# Altium PCB Asfaloth_L2_AVI_ver0.0.PcbDoc (part 1 of 2)
Units mil, origin at the board's own origin, x right, y up, seen from the top; angles counter-clockwise.
Board outline 4135 x 3937.01 mil, 2 copper layers (Top Layer, Bottom Layer); 80 components, 219 nets, 489 pads, 1059 vias.
Unrouted connection lines stored in the file: 5.
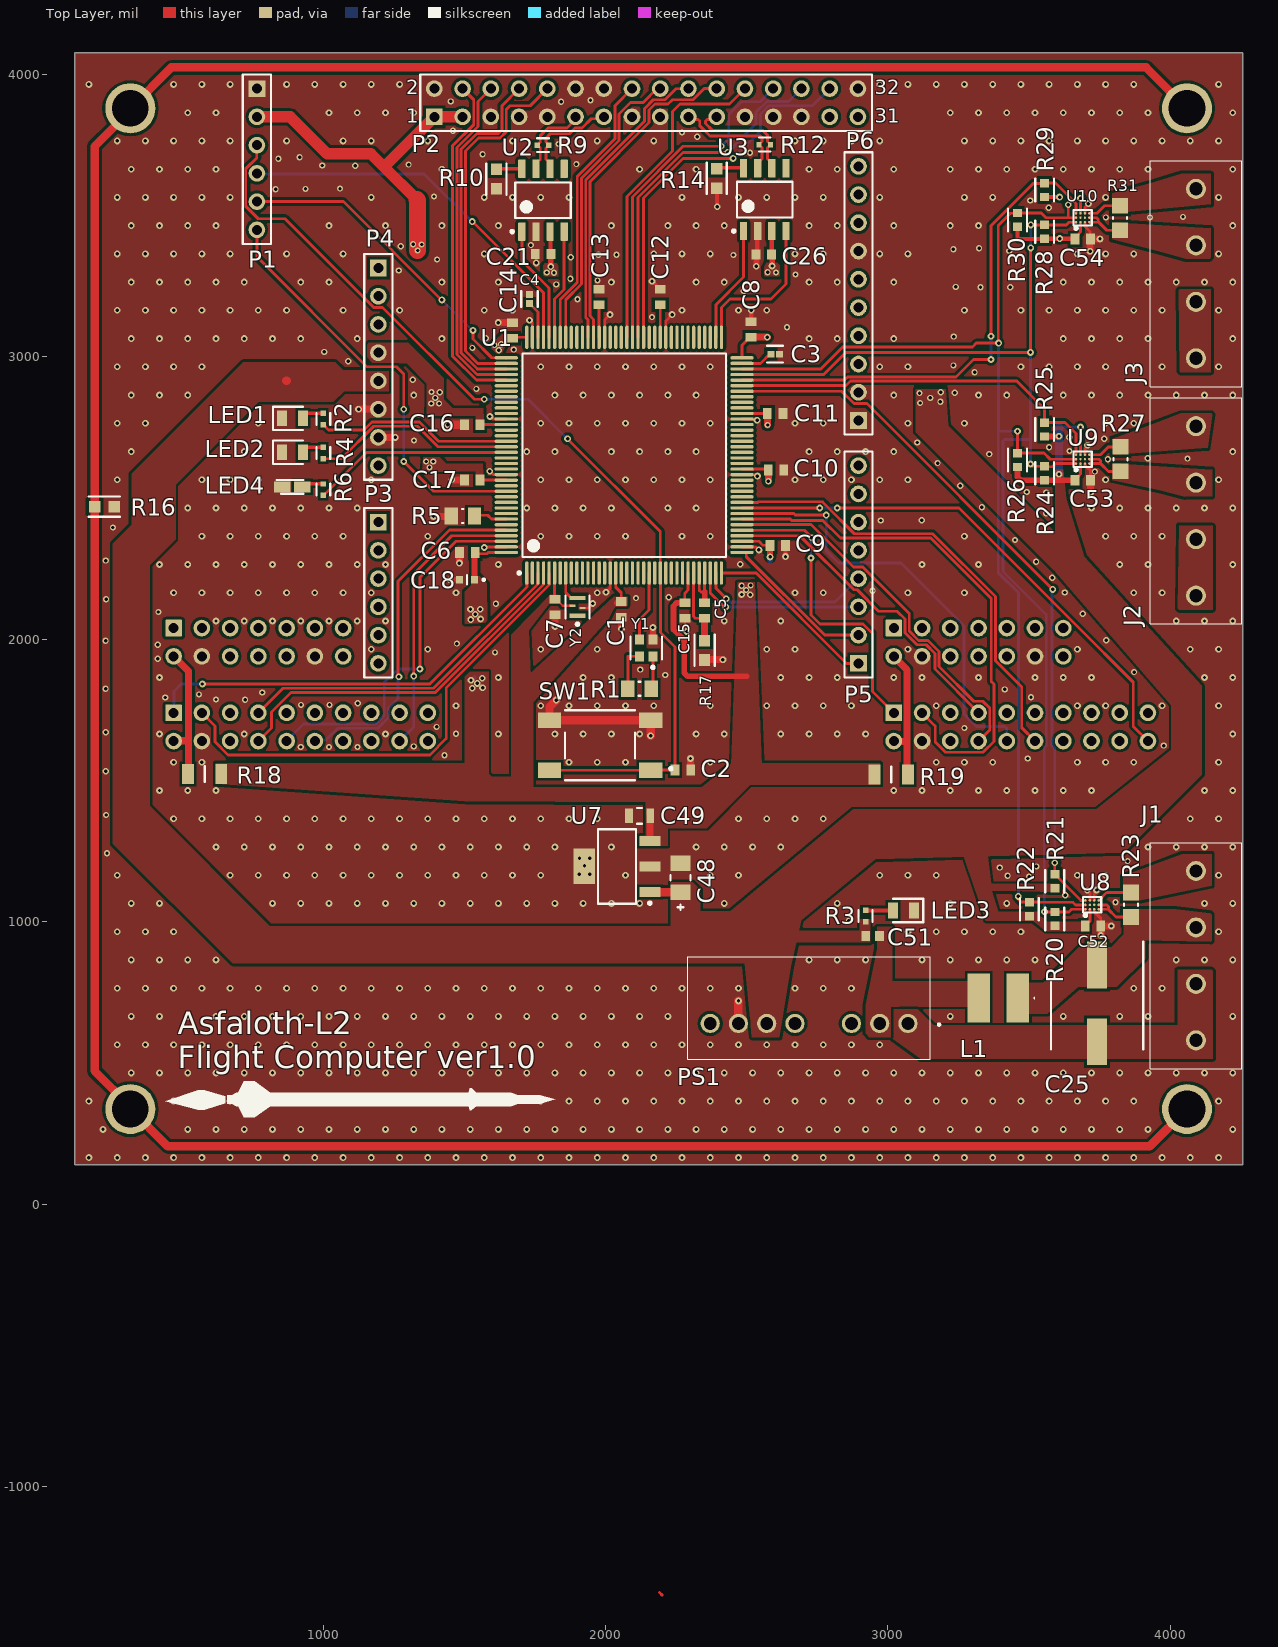
[diagram p0: Top Layer view]
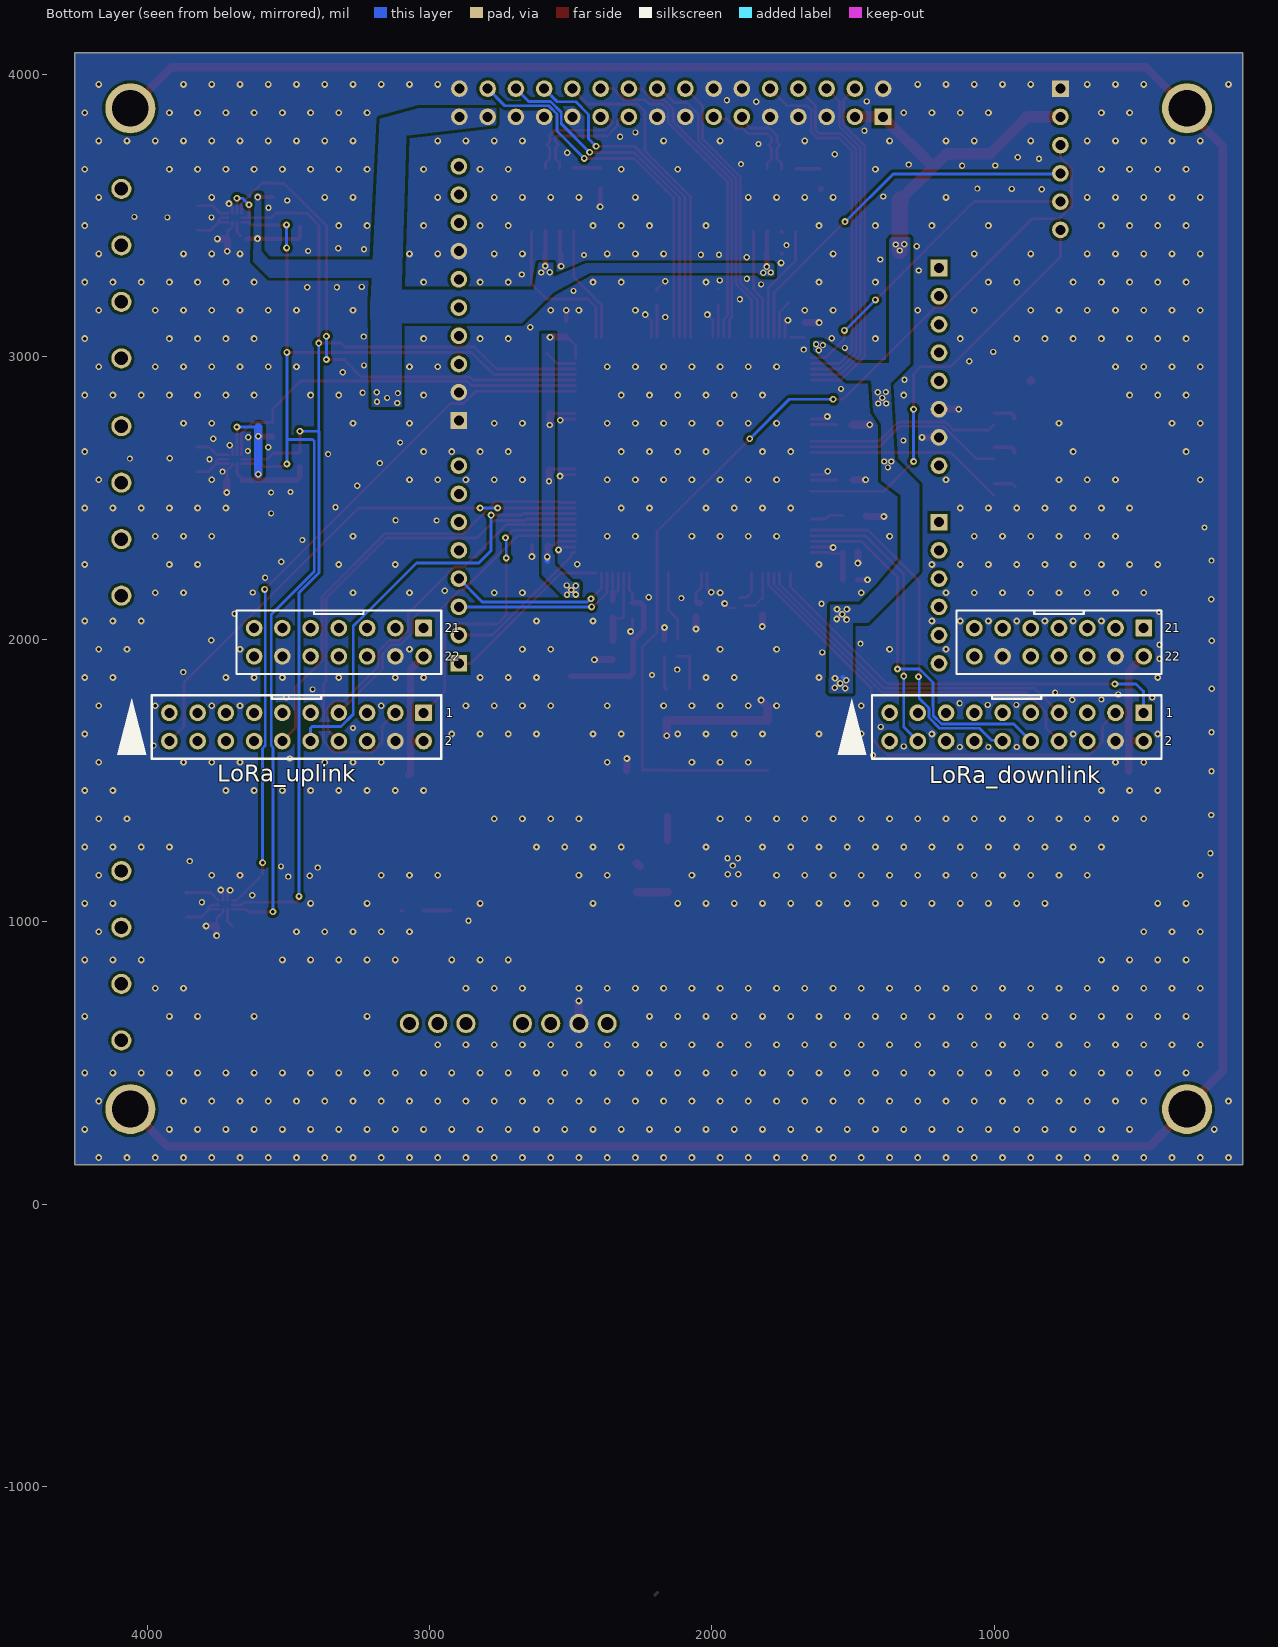
[diagram p1: Bottom Layer view, seen from below]
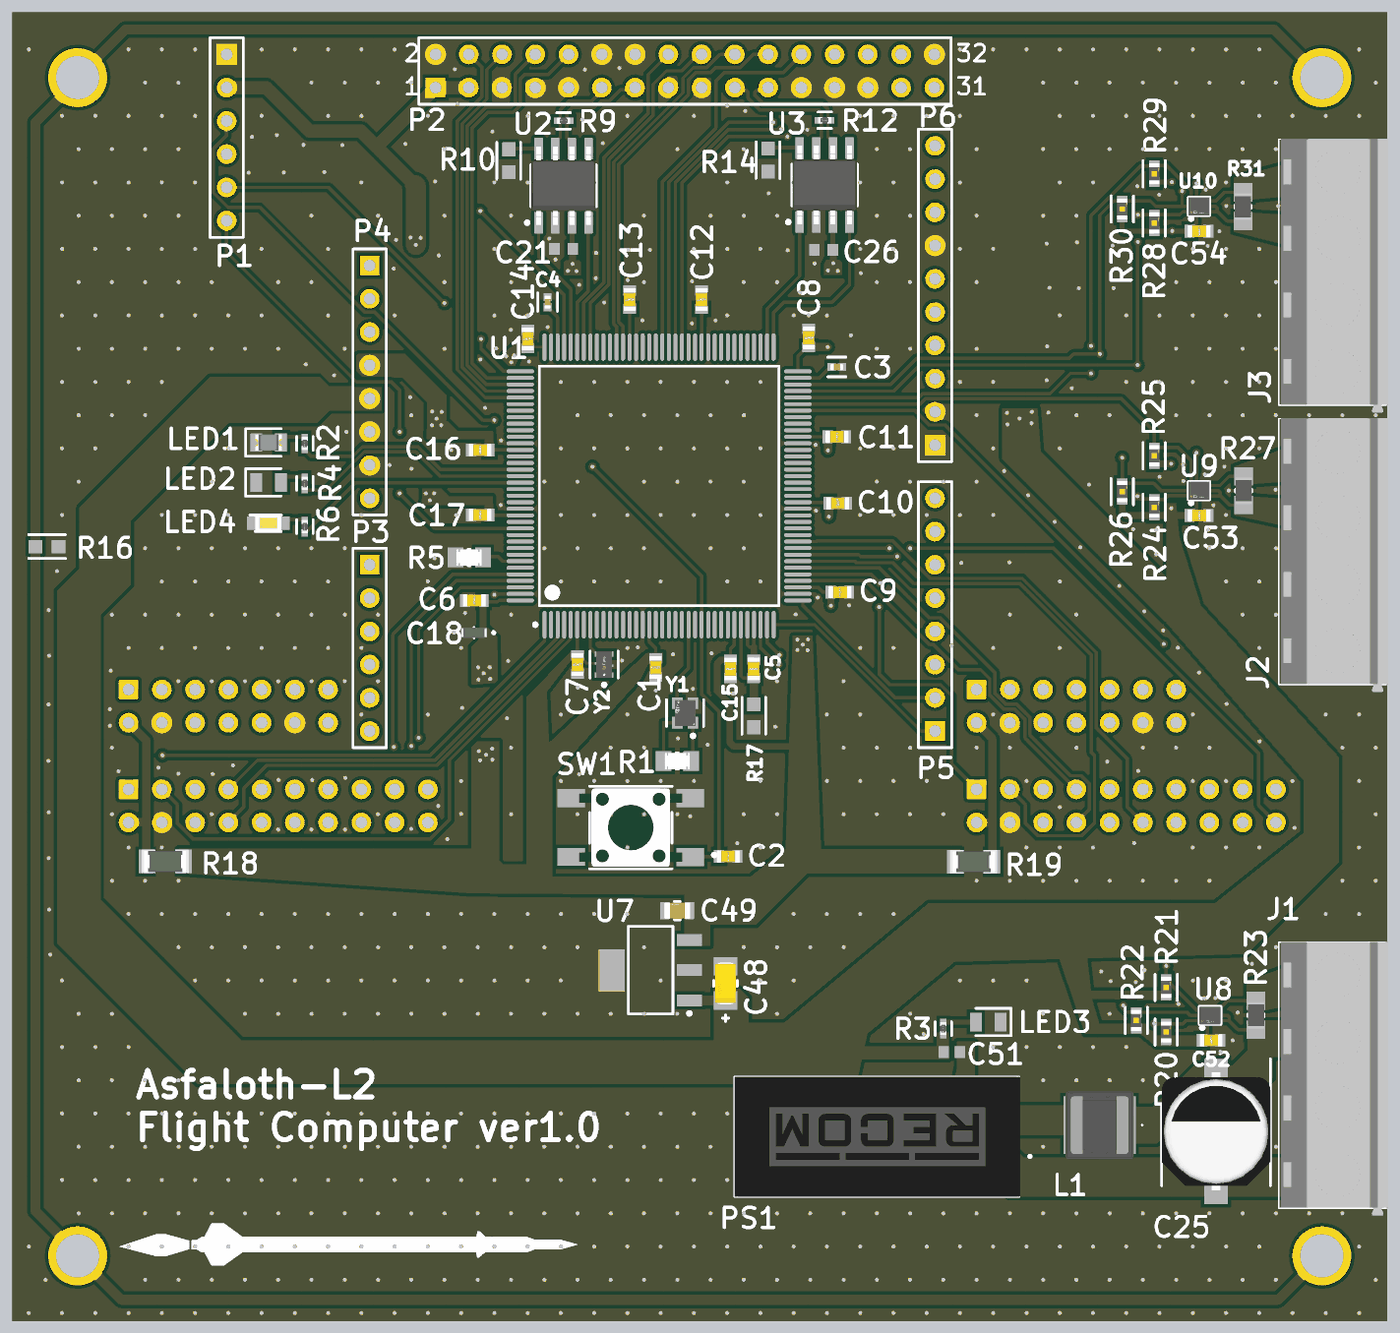
[diagram p3: 3D render of the assembled board from above, using the file's embedded part models]

## Layer stack, top to bottom
Top Solder: solder mask 0.4, Solder Resist, Dk 3.5
Top Layer: signal copper 1.4
Dielectric 1: dielectric 12.6, FR-4, Dk 4.8
Bottom Layer: signal copper 1.4
Bottom Solder: solder mask 0.4, Solder Resist, Dk 3.5

## Board outline
121,140 121,4077.01 4256,4077.01 4256,140

## Design rules (kind name [scope] priority, off if disabled: settings)
Clearance [All] p1: gap=5 ignorepadtopadclearanceinfootprint=FALSE except(10: Arc-Fill Arc-Poly Arc-Region Track-Fill Track-Poly Track-Region SMDPad-Fill SMDPad-Poly SMDPad-Region THPad-Fill THPad-Poly THPad-Region Via-Fill Via-Poly Via-Region Fill-Fill Fill-Poly Fill-Region Poly-Poly Poly-Region Region-Region)
DiffPairsRouting [All] p1: maxlimit=10 minlimit=10 mostfreqgap=10 toplayer_minwidth=10 toplayer_maxwidth=15 toplayer_prefwidth=15 bottomlayer_minwidth=10 bottomlayer_maxwidth=15 bottomlayer_prefwidth=15 maxuncoupledlength=500
PlaneClearance [All] p1: clearance=8
PlaneConnect [All] p1: planeconnectstyle=Direct reliefexpansion=20 reliefentries=4 reliefconductorwidth=10 reliefairgap=10
PolygonConnect PolygonConnect_1 [All vs InNetClass('PWR')] p1: connectstyle=Direct reliefconductorwidth=10 reliefentries=4 polygonreliefangle="90 Angle" airgapwidth=10
PolygonConnect [All] p2: thpad.connectstyle=Relief thpad.reliefconductorwidth=10 thpad.reliefentries=4 thpad.polygonreliefangle="90 Angle" thpad.airgapwidth=10 smdpad.connectstyle=Direct smdpad.reliefconductorwidth=10 smdpad.reliefentries=4 smdpad.polygonreliefangle="90 Angle" smdpad.airgapwidth=10 via.connectstyle=Direct via.reliefconductorwidth=10 via.reliefentries=4 via.polygonreliefangle="90 Angle" via.airgapwidth=10
RoutingVias [All] p1: holewidth=12 width=24 viastyle="Through Hole" minholewidth=12 minwidth=24 maxholewidth=12 maxwidth=24
SolderMaskExpansion Via [All] p1: expansion=4 istentingtop=TRUE useseparateexpansions=TRUE expansionbottom=4 istentingbottom=TRUE
Width PWR [InNetClass('PWR')] p1: maxlimit=60 minlimit=8 preferedwidth=15 minimp=50.000000 maximp=50.000000 favimp=50.000000
Width [All] p2: maxlimit=16 minlimit=6 preferedwidth=10
27 further rules are at their usual default settings.

## Classes and differential pairs
net class PWR: 3V3_VCC 5V_VCC 7V4_VCC 14V8_VCC 25V9_VCC AGND AVDD Chassis_GND FC_GND FC_VCC GND IN-_PM2 IN-_PM3 Motor_GND PA_GND VDD_ANA VDD_FEM VDD_RFS VIN_DCDC
component class U_LoRa_downlink: LoRa_downlink
channel class SX1276_e268v01a: U_LoRa_downlink U_LoRa_uplink
differential pair CAN_Motor: +CAN_Motor_P -CAN_Motor_N
differential pair CAN_EGSE: +CAN_EGSE_P -CAN_EGSE_N

## Components (designator, comment, footprint, x,y, rotation, side; value= is the part's Value field where it differs from the comment)
C1 "0.1uF" CAPC1608X87N 2056,2106.44 r270 top
C2 "0.1uF" CAPC1608X87N 2274,1538 r0 top
C3 "2.2uF" FP-GRT155-0_2-IPC_C 2600.69,3010 r0 top
C4 "2.2uF" FP-GRT155-0_2-IPC_C 1731,3205 r90 top
C5 "0.1uF" CAPC1608X87N 2351,2102.44 r270 top
C6 "0.1uF" CAPC1608X87N 1511,2307.83 r180 top
C7 "0.1uF" CAPC1608X87N 1821,2115 r270 top
C8 "0.1uF" CAPC1608X87N 2516,3097.56 r90 top
C9 "0.1uF" CAPC1608X87N 2610,2333 r0 top
C10 "0.1uF" CAPC1608X87N 2603.56,2600 r0 top
C11 "0.1uF" CAPC1608X87N 2601,2800 r0 top
C12 "0.1uF" CAPC1608X87N 2194.11,3212.56 r90 top
C13 "0.1uF" CAPC1608X87N 1977.57,3212.56 r90 top
C14 "0.1uF" CAPC1608X87N 1671,3094 r90 top
C15 "0.1uF" CAPC1608X87N 2281,2102 r270 top
C16 "0.1uF" CAPC1608X87N 1528.44,2760 r180 top
C17 "0.1uF" CAPC1608X87N 1528.44,2565 r180 top
C18 "4.7uF" GRT188 1509.99,2210.99 r180 top
C21 "Cap Semi" 1608[0603] 1779,3365 r180 top value=100nF
C25 "10uF" CAPAE830X650N 3741,711.06 r270 top locked
C26 "Cap Semi" 1608[0603] 2561,3362 r180 top value=100nF
C48 "4.7uF" FP-TAJA-MFG 2266,1156.18 r270 top
C49 "1uF" FP-GCM21B-0_15-MFG 2121,1375 r180 top
C51 "220pF" CAPC1608X87X35LL15T15 2946.39,950 r180 top
C52 "0.1uF" CAPC1608X87N 3726,985.32 r0 top
C53 "0.1uF" CAPC1608X87N 3689.87,2563.32 r0 top
C54 "0.1uF" CAPC1608X87N 3689.87,3418.32 r0 top
J1 "282837-4" 2828374 4091,580 r90 top locked
J2 "282837-4" 2828374 4091,2155 r90 top locked
J3 "282837-4" 2828374 4091,2995 r90 top locked
L1 "47uH" SRR5228A 3391,730 r270 top
LED1 "LED_R" LEDC2012X80N 891.98,2782.65 r0 top
LED2 "LED_G" LEDC2012X90N 891.98,2662.65 r0 top
LED3 "LED_G" LEDC2012X90N 3056,1040 r180 top
LED4 "LED_B" LEDM2012X100N 891,2540 r0 top
LoRa_downlink "SM12xx Header" "HDR34 Header" 471,1740 r0 bottom locked (schematic designator K_SX12xx)
LoRa_uplink "SM12xx Header" "HDR34 Header" 3021,1740 r0 bottom locked (schematic designator K_SX12xx)
P1 "Header 6" HDR1X6 766,3950 r270 top
P2 "Header 16X2" HDR2X16 1394,3850 r0 top locked
P3 "Header 6" HDR1X6 1196,2415 r270 top locked
P4 "Header 8" HDR1X8 1196,3315 r270 top locked
P5 "Header 8" HDR1X8 2896,1915 r90 top locked
P6 "Header 10" HDR1X10 2896,2775 r90 top locked
PS1 "RS6-0505S" RS60505S 3071,640 r180 top locked
R1 "10kOhm" FP-CRCW0805-e3-IPC_A 2121,1825 r180 top
R2 "120Ohm" FP-ERJ2RK-MFG 1001,2780 r90 top
R3 "120Ohm" FP-ERJ2RK-MFG 2921,1020.18 r90 top
R4 "120Ohm" FP-ERJ2RK-MFG 1001,2660 r90 top
R5 "10kOhm" FP-CRCW0805-e3-IPC_A 1495,2437 r180 top
R6 "120Ohm" FP-ERJ2RK-MFG 1001,2530 r90 top
R9 "120Ohm" FP-ERJ2RK-MFG 1779,3750 r0 top
R10 "0Ohm" FP-AC0603-0_55-IPC_A 1614,3630 r90 top
R12 "120Ohm" FP-ERJ2RK-MFG 2564,3752 r0 top
R14 "0Ohm" FP-AC0603-0_55-IPC_A 2394,3632 r90 top
R16 "0Ohm" FP-AC0603-0_55-IPC_A 226,2470 r0 top
R17 "0Ohm" FP-AC0603-0_55-IPC_A 2351,1961 r90 top
R18 "0Ohm" RESC3216X60N 581,1523 r180 top
R19 "0Ohm" RESC3216X60N 3011.96,1521.99 r0 top
R20 "4.7kOhm" FP-KTR03-IPC_C 3591,1010 r90 top
R21 "4.7kOhm" FP-KTR03-IPC_C 3591,1144 r90 top
R22 "4.7kOhm" FP-KTR03-IPC_C 3501,1045 r90 top
R23 "10mOhm shunt" CSS0805FT10L0 3861,1060.32 r270 top
R24 "4.7kOhm" FP-KTR03-IPC_C 3555,2588 r90 top
R25 "4.7kOhm" FP-KTR03-IPC_C 3555,2743 r90 top
R26 "4.7kOhm" FP-KTR03-IPC_C 3459,2635 r90 top
R27 "10mOhm shunt" CSS0805FT10L0 3824,2638 r270 top
R28 "4.7kOhm" FP-KTR03-IPC_C 3555,3443 r90 top
R29 "4.7kOhm" FP-KTR03-IPC_C 3555,3591 r90 top
R30 "4.7kOhm" FP-KTR03-IPC_C 3459,3485 r90 top
R31 "10mOhm shunt" CSS0805FT10L0 3822,3492 r270 top
SW1 "FSM2JSMAA" FP-FSM2JSMAA-MFG 1981,1625 r270 top
U1 "STM32F429ZIT6TR" STM-LQFP144_M 2066.16,2652.32 r90 top locked
U2 "SN65HVD1050MDREP" D0008A_M 1779,3555 r90 top
U3 "SN65HVD1050MDREP" D0008A_M 2564,3557 r90 top
U7 "MCP1826ST-3302E/DB" SOT-223-DB3_L 2041,1196.06 r180 top
U8 "INA231AIYFFR" FP-YFF0012-IPC_C 3723.13,1060 r90 top
U9 "INA231AIYFFR" FP-YFF0012-IPC_C 3689.87,2638 r90 top
U10 "INA231AIYFFR" FP-YFF0012-IPC_C 3689.87,3493 r90 top
Y1 "SIT8008BI-71-33S-16.000000G" FP-SiT8008-7-MFG 2144.62,1969.53 r90 top
Y2 "SIT1533AI-H4-DCC-32.768D" FP-SiT1533-H-MFG 1901,2115 r90 top

## Footprints (in the part's own frame and the unit in brackets; to place one, negate y for a bottom-side part, rotate by r counter-clockwise, add the part's x,y. Pads: shape width x height; smd on the part's side, far side on the other; paste and mask are expansions set on the pad)
1608[0603] [mm] "Chip Capacitor, Body 1.6x0.8mm, IPC High Density"
  rect 0.8x0.9 smd: 1(-0.7,0) 2(0.7,0)
  body extent -0.87,-0.48 0.87,0.48, height 1.3
2828374 [mm]
  round 1.8 hole 1.2: 1(0,0) 2(5.08,0) 3(10.16,0) 4(15.24,0)
  silkscreen extent -2.54,-4.1 17.78,4.1, body extent -3.1,-4.25 17.82,3.95, height 9.94
CAPAE830X650N [mm]
  rect 4.2x1.8 smd: 1(-3.45,0) 2(3.45,0)
  silkscreen extent -5.55,-4.15 4.15,4.15, body extent 0,0 0,0
CAPC1608X87N [mm]
  rect 0.78x0.98 smd: 1(-0.7,0) 2(0.7,0)
  body extent -0.87,-0.48 0.88,0.47, height 0.87
CAPC1608X87X35LL15T15 [mm] "Chip Capacitor, 2-Leads, Body 1.60x0.80mm, IPC High Density"
  rect 0.8x0.9 smd: 1(-0.625,0) 2(0.625,0)
  body extent -0.87,-0.48 0.87,0.48, height 0.87
CSS0805FT10L0 [mm]
  rect 1.4x1.44 smd: 1(-1.1,0) 2(1.1,0)
  silkscreen extent -0.1,-0.63 0.1,0.63, body extent -1.01,-0.64 1.02,0.63, height 0.3
D0008A_M [mm] "SOIC, 8-Leads, Body 5x4mm, Pitch 1.27mm, IPC Low Density"
  rrect15% 1.65x0.65 smd: 1(-2.825,1.905) 2(-2.825,0.635) 3(-2.825,-0.635) 4(-2.825,-1.905) 5(2.825,-1.905) 6(2.825,-0.635) 7(2.825,0.635) 8(2.825,1.905)
  silkscreen extent -2.95,-2.5 1.6,2.9, body extent -3,-2.45 3,2.45, height 1.63
FP-AC0603-0_55-IPC_A [mil]
  rect 41.68x39.85 smd paste+0 mask+0: 1(-34.52,0) 2(34.52,0)
  silkscreen extent -55,-36 55,36
FP-CRCW0805-e3-IPC_A [mil]
  rect 47.5x59.38 smd paste+0 mask+0: 1(-41.37,0) 2(41.37,0)
  silkscreen extent -3,-25 3,25, body extent -85,-49 85,49, height 10
FP-ERJ2RK-MFG [mm]
  rect 0.475x0.5 smd paste+0 mask+0: 1(-0.513,0) 2(0.513,0)
  silkscreen extent -0.53,-0.63 0.53,0.63, body extent -0.85,-0.38 0.85,0.38, height 0.25
FP-FSM2JSMAA-MFG [mm]
  rect 1.38x2.1 smd paste+0 mask+0: 1(2.25,4.55) 2(2.24,-4.55) 3(-2.24,4.55) 4(-2.24,-4.55)
  silkscreen extent -3.15,-3.15 3.15,6.5, body extent -3.25,-5.7 3.25,5.7, height 0.25
FP-GCM21B-0_15-MFG [mm]
  rect 0.7x1.3 smd paste+0 mask+0: 1(-0.95,0) 2(0.95,0)
  silkscreen extent -0.23,-0.7 0.23,0.7, body extent -1.4,-0.8 1.4,0.8, height 0.25
FP-GRT155-0_2-IPC_C [mil]
  rect 24.73x23.87 smd paste+0 mask+0: 1(-15.32,0) 2(15.31,0)
  silkscreen extent -28,-30 28,30, body extent -32,-18 32,18, height 10
FP-KTR03-IPC_C [mil]
  rect 29.85x31.97 smd paste+0 mask+0: 1(-24.68,0) 2(24.68,0)
  silkscreen extent -40,-33 40,33, body extent -44,-22 44,22, height 10
FP-SiT1533-H-MFG [mm]
  rect 0.4x1.4 smd paste+0 mask+0: 1(-0.8,0) 3(0.8,0)
  rect 0.2x0.5 smd paste+0 mask+0: 2(-0.1,-0.45) 4(0.1,0.45)
  silkscreen extent -1.67,-1.07 1.02,1.07, body extent -1.12,-0.8 1.12,0.8, height 0.25
FP-SiT8008-7-MFG [mm]
  rect 0.9x0.8 smd paste+0 mask+0: 1(-0.75,-0.6) 2(0.75,-0.6) 3(0.75,0.6) 4(-0.75,0.6)
  silkscreen extent -1.87,-1.41 1.02,1.43, body extent -1.3,-1.1 1.3,1.1, height 0.25
FP-TAJA-MFG [mm]
  rect 1.4x1.8 smd paste+0 mask+0: 1(-1.3,0) 2(1.3,0)
  silkscreen extent -0.23,-0.9 2.9,0.9, body extent -2.1,-1 2.1,1, height 0.25
FP-YFF0012-IPC_C [mm]
  round 0.212 smd paste+0 mask+0: A1(-0.4,0.6) A2(0,0.6) A3(0.4,0.6) B1(-0.4,0.2) B2(0,0.2) B3(0.4,0.2) C1(-0.4,-0.2) C2(0,-0.2) C3(0.4,-0.2) D1(-0.4,-0.6) D2(0,-0.6) D3(0.4,-0.6)
  silkscreen extent -1.06,-0.82 0.69,0.82, body extent -0.79,-0.92 0.79,0.92, height 0.25
GRT188 [mm]
  rect 0.65x0.7 smd: 1(-0.675,0) 2(0.675,0)
  silkscreen extent -1.6,-0.4 0,0.4, body extent -0.93,-0.4 0.93,0.4, height 0.9
HDR1X6 [mm] "Connector; Header; 6 Position"
  rect 1.5x1.5 hole 0.9 mask+0.05: 1(0,0)
  round 1.5 hole 0.9 mask+0.05: 2(2.54,0) 3(5.08,0) 4(7.62,0) 5(10.16,0) 6(12.7,0)
  silkscreen extent -1.27,-1.27 13.97,1.27
HDR1X8 [mm] "Connector; Header; 8 Position"
  rect 1.5x1.5 hole 0.9 mask+0.05: 1(0,0)
  round 1.5 hole 0.9 mask+0.05: 2(2.54,0) 3(5.08,0) 4(7.62,0) 5(10.16,0) 6(12.7,0) 7(15.24,0) 8(17.78,0)
  silkscreen extent -1.27,-1.27 19.05,1.27
HDR1X10 [mm] "Connector; Header; 10 Position"
  rect 1.5x1.5 hole 0.9 mask+0.05: 1(0,0)
  round 1.5 hole 0.9 mask+0.05: 2(2.54,0) 3(5.08,0) 4(7.62,0) 5(10.16,0) 6(12.7,0) 7(15.24,0) 8(17.78,0) 9(20.32,0) 10(22.86,0)
  silkscreen extent -1.27,-1.27 24.13,1.27
HDR2X16 [mm] "Connector; Header; 16x2 Position"
  rect 1.5x1.5 hole 0.9 mask+0.05: 1(0,0)
  round 1.5 hole 0.9 mask+0.05: 2(0,2.54) 3(2.54,0) 4(2.54,2.54) 5(5.08,0) 6(5.08,2.54) 7(7.62,0) 8(7.62,2.54) 9(10.16,0) 10(10.16,2.54) 11(12.7,0) 12(12.7,2.54) 13(15.24,0) 14(15.24,2.54) 15(17.78,0) 16(17.78,2.54) 17(20.32,0) 18(20.32,2.54) 19(22.86,0) 20(22.86,2.54) 21(25.4,0) 22(25.4,2.54) 23(27.94,0) 24(27.94,2.54) 25(30.48,0) 26(30.48,2.54) 27(33.02,0) 28(33.02,2.54) 29(35.56,0) 30(35.56,2.54) 31(38.1,0) 32(38.1,2.54)
  silkscreen extent -1.27,-1.27 39.37,3.81
"HDR34 Header" [mm] "Connector; Header; 34 Position - SM12xx Header"
  rrect10% 1.5x1.5 hole 0.9 mask+0.05: 1(0,0) 21(0,-7.62)
  round 1.5 hole 0.9 mask+0.05: 2(0,2.54) 3(2.54,0) 4(2.54,2.54) 5(5.08,0) 6(5.08,2.54) 7(7.62,0) 8(7.62,2.54) 9(10.16,0) 10(10.16,2.54) 11(12.7,0) 12(12.7,2.54) 13(15.24,0) 14(15.24,2.54) 15(17.78,0) 16(17.78,2.54) 17(20.32,0) 18(20.32,2.54) 19(22.86,0) 20(22.86,2.54) 22(0,-5.08) 23(2.54,-7.62) 24(2.54,-5.08) 25(5.08,-7.62) 26(5.08,-5.08) 27(7.62,-7.62) 28(7.62,-5.08) 29(10.16,-7.62) 30(10.16,-5.08) 31(12.7,-7.62) 32(12.7,-5.08) 33(15.24,-7.62) 34(15.24,-5.08)
  silkscreen extent -1.59,-9.21 27.53,4.13
LEDC2012X80N [mm]
  rect 0.9x1.4 smd: 1(-0.95,0) 2(0.95,0)
  silkscreen extent -1.75,-1.05 0.95,1.05, body extent -1,-0.63 1,0.63, height 0.8
LEDC2012X90N [mm]
  rect 0.9x1.4 smd: 1(-0.95,0) 2(0.95,0)
  silkscreen extent -1.75,-1.05 0.95,1.05
LEDM2012X100N [mm]
  rect 1.45x1 smd: 1(-0.9,0) 2(0.9,0)
  silkscreen extent -1.4,-0.63 1,0.63, body extent -1,-0.63 1,0.63, height 0.8
RESC3216X60N [mm]
  rect 1.05x1.8 smd: 1(-1.5,0) 2(1.5,0)
  silkscreen extent 0,-0.7 0,0.7, body extent -1.8,-0.9 1.8,0.9, height 0.61
RS60505S [mm]
  round 1.725 hole 1.15: 1(0,0) 2(2.54,0) 3(5.08,0) 5(10.16,0) 6(12.7,0) 7(15.24,0) 8(17.78,0)
  silkscreen extent -2.9,-6 19.79,3.2, body extent -2.05,-6 19.75,3.2, height 10.97
SOT-223-DB3_L [mm] "SOT223, 4-Leads, Body 6.5x3.5mm, Pitch 2.3mm, Lead Span 7mm, IPC High Density"
  rect 1.9x0.9 smd: 1(-2.95,2.3) 2(-2.95,0) 3(-2.95,-2.3)
  rect 1.9x3.2 smd mask-3.2: 4(2.95,0)
  silkscreen extent -3.08,-3.35 1.7,3.42, body extent -1.85,-3.35 1.85,3.35, height 1.8
SRR5228A [mm]
  rect 4.4x2 smd: 1(0,1.75) 2(0,-1.75)
  silkscreen extent -0.05,3.2 0.05,3.3, body extent -2.6,-2.6 2.6,2.6, height 3.2
STM-LQFP144_M [mm] "Thin QFP, 144-Leads, Body 20x20mm, Pitch 0.5mm, IPC Low Density"
  oval 2.1x0.3 smd: 1(-10.6,8.75) 2(-10.6,8.25) 3(-10.6,7.75) 4(-10.6,7.25) 5(-10.6,6.75) 6(-10.6,6.25) 7(-10.6,5.75) 8(-10.6,5.25) 9(-10.6,4.75) 10(-10.6,4.25) 11(-10.6,3.75) 12(-10.6,3.25) 13(-10.6,2.75) 14(-10.6,2.25) 15(-10.6,1.75) 16(-10.6,1.25) 17(-10.6,0.75) 18(-10.6,0.25) 19(-10.6,-0.25) 20(-10.6,-0.75) 21(-10.6,-1.25) 22(-10.6,-1.75) 23(-10.6,-2.25) 24(-10.6,-2.75) 25(-10.6,-3.25) 26(-10.6,-3.75) 27(-10.6,-4.25) 28(-10.6,-4.75) 29(-10.6,-5.25) 30(-10.6,-5.75) 31(-10.6,-6.25) 32(-10.6,-6.75) 33(-10.6,-7.25) 34(-10.6,-7.75) 35(-10.6,-8.25) 36(-10.6,-8.75) 73(10.6,-8.75) 74(10.6,-8.25) 75(10.6,-7.75) 76(10.6,-7.25) 77(10.6,-6.75) 78(10.6,-6.25) 79(10.6,-5.75) 80(10.6,-5.25) 81(10.6,-4.75) 82(10.6,-4.25) 83(10.6,-3.75) 84(10.6,-3.25) 85(10.6,-2.75) 86(10.6,-2.25) 87(10.6,-1.75) 88(10.6,-1.25) 89(10.6,-0.75) 90(10.6,-0.25) 91(10.6,0.25) 92(10.6,0.75) 93(10.6,1.25) 94(10.6,1.75) 95(10.6,2.25) 96(10.6,2.75) 97(10.6,3.25) 98(10.6,3.75) 99(10.6,4.25) 100(10.6,4.75) 101(10.6,5.25) 102(10.6,5.75) 103(10.6,6.25) 104(10.6,6.75) 105(10.6,7.25) 106(10.6,7.75) 107(10.6,8.25) 108(10.6,8.75)
  oval 0.3x2.1 smd: 37(-8.75,-10.6) 38(-8.25,-10.6) 39(-7.75,-10.6) 40(-7.25,-10.6) 41(-6.75,-10.6) 42(-6.25,-10.6) 43(-5.75,-10.6) 44(-5.25,-10.6) 45(-4.75,-10.6) 46(-4.25,-10.6) 47(-3.75,-10.6) 48(-3.25,-10.6) 49(-2.75,-10.6) 50(-2.25,-10.6) 51(-1.75,-10.6) 52(-1.25,-10.6) 53(-0.75,-10.6) 54(-0.25,-10.6) 55(0.25,-10.6) 56(0.75,-10.6) 57(1.25,-10.6) 58(1.75,-10.6) 59(2.25,-10.6) 60(2.75,-10.6) 61(3.25,-10.6) 62(3.75,-10.6) 63(4.25,-10.6) 64(4.75,-10.6) 65(5.25,-10.6) 66(5.75,-10.6) 67(6.25,-10.6) 68(6.75,-10.6) 69(7.25,-10.6) 70(7.75,-10.6) 71(8.25,-10.6) 72(8.75,-10.6) 109(8.75,10.6) 110(8.25,10.6) 111(7.75,10.6) 112(7.25,10.6) 113(6.75,10.6) 114(6.25,10.6) 115(5.75,10.6) 116(5.25,10.6) 117(4.75,10.6) 118(4.25,10.6) 119(3.75,10.6) 120(3.25,10.6) 121(2.75,10.6) 122(2.25,10.6) 123(1.75,10.6) 124(1.25,10.6) 125(0.75,10.6) 126(0.25,10.6) 127(-0.25,10.6) 128(-0.75,10.6) 129(-1.25,10.6) 130(-1.75,10.6) 131(-2.25,10.6) 132(-2.75,10.6) 133(-3.25,10.6) 134(-3.75,10.6) 135(-4.25,10.6) 136(-4.75,10.6) 137(-5.25,10.6) 138(-5.75,10.6) 139(-6.25,10.6) 140(-6.75,10.6) 141(-7.25,10.6) 142(-7.75,10.6) 143(-8.25,10.6) 144(-8.75,10.6)
  silkscreen extent -10.72,-9.15 9.15,9.57, body extent -10,-10 10,10, height 1.6

## Part data
C1 C2 C5 C6 C7 C8 C9 C10 C11 C12 C13 C14 C15 C16 C17 C52 C53 C54: library part C0603C104J4RECAUTO, "Capacitor", Manufacturer_Name=KEMET, Mouser Part Number=80-C0603C104J4RECAUT, Datasheet Link=https://content.kemet.com/datasheets/KEM_C1090_X7R_ESD.pdf, Height=0.87mm, Manufacturer_Part_Number=C0603C104J4RECAUTO, Mouser Price/Stock=https://www.mouser.co.uk/ProductDetail/KEMET/C0603C104J4RECAUTO?qs=MLItCLRbWswpTgrKtA5UXg%3D%3D
C3 C4: library part CMP-06035-008228-1, "Multi-Layer Ceramic Capacitor 2.2uF 10V X6S ±10% 0402 Paper T/R", Case Code (Imperial)=0402, Case Code (Metric)=1005, Dielectric=X6S, Max Operating Temperature=105°C, Min Operating Temperature=-55°C, Ratings=AEC-Q200, Tolerance=10%, Voltage Rating=10V, Capacitance=2.2uF, Case/Package=0402, Length=0.039inch, Mount="Surface Mount", Packaging="Tape and Reel", Thickness=0.022inch, Voltage Rating (DC)=10V, Width=0.02inch
C18: library part GRT188C71C475KE13D, "Capacitor", Manufacturer_Name="Murata Electronics", Mouser Part Number=81-GRT188C71C475KE13, Arrow Part Number=GRT188C71C475KE13D, Arrow Price/Stock=https://www.arrow.com/en/products/grt188c71c475ke13d/murata-manufacturing?region=nac, Datasheet Link=https://www.murata.com/en-global/products/productdetail?partno=GRT188C71C475KE13%23, Height=0.8mm, Manufacturer_Part_Number=GRT188C71C475KE13D, Mouser Price/Stock=https://www.mouser.co.uk/ProductDetail/Murata-Electronics/GRT188C71C475KE13D?qs=pUKx8fyJudC7lYX%252BQNKS7Q%3D%3D
C21 C26: "Capacitor (Semiconductor SIM Model)", LatestRevisionDate=29-May-2009, LatestRevisionNote="IPC-7351 Footprint Added.", PackageDescription="Chip Capacitor", PackageReference=C1206, Published=8-Jun-2000, Publisher="Altium Limited"
C25: library part EEE-TG1J100P, "Capacitor Polarised", Manufacturer_Name=Panasonic, Mouser Part Number=667-EEE-TG1J100P, Arrow Part Number=EEE-TG1J100P, Arrow Price/Stock=https://www.arrow.com/en/products/eee-tg1j100p/panasonic, Datasheet Link=http://industrial.panasonic.com/cdbs/www-data/pdf/RDE0000/ABA0000C1187.pdf, Height=6.5mm, Manufacturer_Part_Number=EEE-TG1J100P, Mouser Price/Stock=https://www.mouser.co.uk/ProductDetail/Panasonic/EEE-TG1J100P?qs=aAAGLDy8P2x3htHP%2FTxLDQ%3D%3D, Supplier 1=Mouser, Supplier Part Number 1=667-EEE-TG1J100P
C48: library part CMP-2100-03687-2, "4.7uF 16V  ±10% 4Ω 1206  SMD Tantalum Capacitor", Case Code (Imperial)=1206, Case Code (Metric)=3216, Dielectric Material=Tantalum, ESR (Equivalent Series Resistance)=4R, Leakage Current=800nA, Max Operating Temperature=125°C, Min Operating Temperature=-55°C, Package Quantity=1, Tolerance=10%, Voltage=16V, Capacitance=4.7uF, Case/Package=1206, Construction=Flat, Depth=1.6mm, Dissipation Factor=6%, Features="General Purpose", Height=1.6mm, Height - Seated (Max)=0.071inch, Lead Free="Lead Free", Lead Pitch=1.1mm, Length=3.2mm, Mount="Surface Mount", Number of Pins=2, Packaging="Tape and Reel", Polarity=Polar, Radiation Hardening=No, REACH SVHC="No SVHC", RoHS Compliant=Yes, Series=TAJ, Termination=SMD/SMT, Voltage Rating=16V, Voltage Rating (DC)=16V, Width=1.6mm
C49: library part CMP-06035-047787-1, "Ceramic Capacitor for Automotive 1uF ±10% 16VDC X7R 0805 Embossed T/R", Case/Package=0805, Dielectric=X7R, Max Operating Temperature=125°C, Min Operating Temperature=-55°C, Tolerance=10%, Voltage Rating (DC)=16V, Capacitance=1uF, Depth=1.25mm, Length=2mm, Packaging="Tape and Reel"
C51: library part CMP-2006-03337-1, Manufacturer=Kemet, Part Number=C0603C221J5GACAUTO
J1 J2 J3: "Connector", Manufacturer_Name="TE Connectivity", Mouser Part Number=571-2828374, Arrow Part Number=282837-4, Arrow Price/Stock=https://www.arrow.com/en/products/282837-4/te-connectivity?region=nac, Datasheet Link=https://www.te.com/commerce/DocumentDelivery/DDEController?Action=srchrtrv&DocNm=1-1773458-1_EURO_STYLE_QRG&DocType=Data%20Sheet&DocLang=English&PartCntxt=282837-4&DocFormat=pdf, Height=10.3mm, Manufacturer_Part_Number=282837-4, Mouser Price/Stock=https://www.mouser.co.uk/ProductDetail/TE-Connectivity/282837-4?qs=A%252Bip%252BNCYi6MiQzbqNH27Ug%3D%3D
L1: library part SRR5228A-470M, "Inductor", Manufacturer_Name=Bourns, Mouser Part Number=6521-SRR5228A-470M, Datasheet Link=https://www.bourns.com/docs/Product-Datasheets/SRR5228A.pdf, Manufacturer_Part_Number=SRR5228A-470M, Mouser Price/Stock=https://www.mouser.co.uk/ProductDetail/Bourns/SRR5228A-470M?qs=QpmGXVUTftG9kA8o879uEQ%3D%3D, Supplier 1=Mouser, Supplier Part Number 1=6521-SRR5228A-470M
LED1: library part SML-H12V8TT86C, "LED", Manufacturer_Name="ROHM Semiconductor", Mouser Part Number=755-SML-H12V8TT86C, Datasheet Link=https://www.mouser.in/ProductDetail/ROHM-Semiconductor/SML-H12V8TT86C?qs=HXFqYaX1Q2xM3o6aiCqz5g%3D%3D, Height=0.8mm, Manufacturer_Part_Number=SML-H12V8TT86C, Mouser Price/Stock=https://www.mouser.co.uk/ProductDetail/ROHM-Semiconductor/SML-H12V8TT86C?qs=HXFqYaX1Q2xM3o6aiCqz5g%3D%3D
LED2 LED3: library part SML-H12P8TT86C, "LED", Manufacturer_Name="ROHM Semiconductor", Mouser Part Number=755-SML-H12P8TT86C, Datasheet Link=https://mouser.componentsearchengine.com/Datasheets/2/SML-H12P8TT86C.pdf, Height=0.9mm, Manufacturer_Part_Number=SML-H12P8TT86C, Mouser Price/Stock=https://www.mouser.co.uk/ProductDetail/ROHM-Semiconductor/SML-H12P8TT86C?qs=HXFqYaX1Q2xINkpk%2F8IQZg%3D%3D
LED4: library part SMLMN2BCTT86C, "LED", Manufacturer_Name="ROHM Semiconductor", Mouser Part Number=755-SMLMN2BCTT86C, Arrow Part Number=SMLMN2BCTT86C, Arrow Price/Stock=https://www.arrow.com/en/products/smlmn2bctt86c/rohm-semiconductor, Datasheet Link=https://fscdn.rohm.com/en/products/databook/datasheet/opto/led/chip_mono/smlmn2bctt86(c)-e.pdf, Height=1mm, Manufacturer_Part_Number=SMLMN2BCTT86C, Mouser Price/Stock=https://www.mouser.co.uk/ProductDetail/ROHM-Semiconductor/SMLMN2BCTT86C?qs=EAJhGnHnT02MwYNfU4gt9w%3D%3D
LoRa_downlink LoRa_uplink: "SM12xx Header; 34pins: 2x10pins + 2x7pins", Supplier Part Number 1=649-68602-120HLF, LatestRevisionDate=24.8.2012, LatestRevisionNote="Re-released for DXP Platform.", Publisher="Altium Limited", Supplier 1=Mouser, Supplier 2=Mouser, Supplier Part Number 2=649-67997-114HLF
P1 P3: "Header, 6-Pin", LatestRevisionDate=17-Jul-2002, LatestRevisionNote="Re-released for DXP Platform.", Publisher="Altium Limited"
P2: "Header, 16-Pin, Dual row", LatestRevisionDate=17-Jul-2002, LatestRevisionNote="Re-released for DXP Platform.", Publisher="Altium Limited"
P4 P5: "Header, 8-Pin", LatestRevisionDate=17-Jul-2002, LatestRevisionNote="Re-released for DXP Platform.", Publisher="Altium Limited"
P6: "Header, 10-Pin", LatestRevisionDate=17-Jul-2002, LatestRevisionNote="Re-released for DXP Platform.", Publisher="Altium Limited"
PS1: "Power Supply", Manufacturer_Name="RECOM Power", Mouser Part Number=919-RS6-0505S, Arrow Part Number=RS6-0505S, Arrow Price/Stock=https://www.arrow.com/en/products/rs6-0505s/recom-power?region=nac, Datasheet Link=https://www.recom-power.com/pdf/Econoline/RS6.pdf, Height=11.6mm, Manufacturer_Part_Number=RS6-0505S, Mouser Price/Stock=https://www.mouser.co.uk/ProductDetail/RECOM-Power/RS6-0505S?qs=FLBwGrBR9%252B3r5kgbzQWtZg%3D%3D, Supplier 1=Mouser, Supplier Part Number 1=919-RS6-0505S
R1 R5: library part CMP-2001-04908-2, "RES Thick Film, 10kΩ, 1%, 0.125W, 100ppm/°C, 0805", Case Code (Imperial)=0805, Case Code (Metric)=2012, Max Operating Temperature=155°C, Min Operating Temperature=-55°C, Package Quantity=5000, Power Rating=125mW, Resistance=10kR, Temperature Coefficient=100ppm/°C, Tolerance=1%, Voltage Rating=150V, Case/Package=0805, Composition="Thick Film", Contact Plating=Tin, Depth=1.25mm, Height=0.45mm, Lead Free="Lead Free", Length=2mm, Military Standard=Not, Packaging="Tape and Reel", Radiation Hardening=No, Termination=SMD/SMT, Voltage Rating (DC)=150V, Weight=0.000194oz, Width=1.25mm
R2 R3 R4 R6 R9 R12: library part CMP-2002-00645-2, "RES SMD 120 OHM 1% 1/10W 0402", Case Code (Imperial)=0402, Case Code (Metric)=1005, Max Operating Temperature=155°C, Max Power Dissipation=100mW, Min Operating Temperature=-55°C, Package Quantity=10000, Resistance=120R, Resistor Type="Thick Film", Temperature Coefficient=100ppm/°C, Tolerance=1%, Voltage Rating=50V, Case/Package=0402, Contact Plating=Tin, Depth=0.5mm, Features="Automotive AEC-Q200", Height=0.35mm, Lead Free="Lead Free", Length=1mm, Military Standard=Not, Mount="Surface Mount", Number of Pins=2, Number of Terminations=2, Packaging="Cut Tape", Power Rating=100mW, Radiation Hardening=No, REACH SVHC="No SVHC", RoHS Compliant=Yes, Series=ERJ-2Rx, Technology="THICK FILM", Termination=SMD/SMT, Voltage Rating (DC)=50V, Weight=0.000388oz, Width=0.5mm
R10 R14 R16 R17: library part CMP-2000-04815-2, "RES SMD 0 OHM JUMPER 1/10W 0603", Case Code (Imperial)=0603, Case Code (Metric)=1608, Max Operating Temperature=155°C, Max Power Dissipation=100mW, Min Operating Temperature=-55°C, Package Quantity=1, Resistance=0R, Resistor Type="Thick Film", Temperature Coefficient=200ppm/°C, Tolerance=1%, Voltage Rating=50V, Case/Package=0603, Features="Moisture Resistant", Height=0.022inch, Lead Free="Lead Free", Length=0.063inch, Number of Terminations=2, Packaging="Tape and Reel", Power Rating=100mW, Series=AC, Size Code=0603, Termination=SMD/SMT, Width=0.031inch
R18 R19: library part RCA12060000ZSEA, "Resistor", Manufacturer_Name=Vishay, Mouser Part Number=71-RCA12060000ZSEA, Arrow Part Number=RCA12060000ZSEA, Arrow Price/Stock=https://www.arrow.com/en/products/rca12060000zsea/vishay?region=nac, Datasheet Link=https://www.mouser.in/datasheet/2/427/rcae3-1761931.pdf, Height=0.6mm, Manufacturer_Part_Number=RCA12060000ZSEA, Mouser Price/Stock=https://www.mouser.co.uk/ProductDetail/Vishay-Draloric/RCA12060000ZSEA?qs=4%252Ber4tcBTOgzMfDdqtZgmA%3D%3D
R20 R21 R22 R24 R25 R26 R28 R29 R30: library part CMP-08839-030274-1, "Res Thick Film 0603 4.7kΩ 5% 0.1W ±200ppm/°C Automotive Paper T/R", Case/Package=0603, Max Operating Temperature=155°C, Max Power Dissipation=100mW, Min Operating Temperature=-55°C, Package Quantity=5000, Resistance=4.7kR, Resistor Type="Thick Film", Temperature Coefficient=200ppm/°C, Tolerance=5%, Height=0.022inch, Length=0.063inch, Number of Terminations=2, Packaging="Tape and Reel", RoHS Compliant=Yes, Series=KTR03, Width=0.031inch
R23 R27 R31: library part CSS0805FT10L0, "Resistor", Manufacturer_Name="Stackpole Electronics", Mouser Part Number=708-CSS0805FT10L0, Datasheet Link=https://cs.seielect.com/catalog/SEI-CSS_CSSH.PDF, Height=0.65mm, Manufacturer_Part_Number=CSS0805FT10L0, Mouser Price/Stock=https://www.mouser.co.uk/ProductDetail/SEI-Stackpole/CSS0805FT10L0?qs=IPgv5n7u5QYApC%252BwHqTVbQ%3D%3D
SW1: library part CMP-03402-000003-1, "SWITCH TACTILE SPST-NO 0.05A 24V", Contact Current Rating=50mA, Contact Resistance=100mΩ, Manufacturer="TE Connectivity", Operating Force=260gf, Package=0, Temperature="-35°C to +85°C", Temperature Range High=+85°C, Temperature Range Low=-35°C, Voltage Rating Dc=24V, Automotive=No, Category=Switch, ComponentLink2Description=Datasheet, ComponentLink2URL=https://www.te.com/commerce/DocumentDelivery/DDEController?Action=showdoc&DocId=Customer+Drawing%7F2-1437565-7%7FV%7Fpdf%7FEnglish%7FENG_CD_2-1437565-7_V.pdf%7F2-1437565-8, Device Class L1=Electromechanical, Device Class L2=Switches, Device Class L3="Pushbutton Switches", Digikey Description="SWITCH TACTILE SPST-NO 0.05A 24V", Electromechanical Life=100000Cycles, Height=4.59mm, Lead Free=Yes, Manufacturer Part Number=FSM2JSMAA, Mount="Surface Mount", Mouser Description="Tactile Switches TACTILE 260G FORCE S", Octopart=https://octopart.com/fsm2jsmaa-te+connectivity-41720620, RoHS=TRUE, Standoff Height=0.05mm, Throw Configuration=SPST-NO
U1: library part CMP-0243-00201-1, "ARM Cortex-M4 32-bit MCU+FPU, 2048 KB Flash, 256 KB Internal RAM, 114 I/Os, 144-Pin LQFP, -40 to 85 degC, Tape and Reel", I/Os (High Current)=114, Operating Frequency(F) (Processor speed) (MHz)=180, Package Description=LQFP144, Package Reference="144-Pin Low Profile Quad Flat Package, Body 20 x 20 mm, Pitch 0.5 mm", Supply Voltage(Vcc) min (V)=1.7, ComponentLink1Description="Manufacturer URL", ComponentLink1URL=http://www.st.com/, ComponentLink2Description=Datasheet, ComponentLink2URL=http://www.st.com/st-web-ui/static/active/en/resource/technical/document/datasheet/DM00071990.pdf, Core="ARM Cortex-M4", D/A Converter=2, DatasheetVersion="Rev. 7", FLASH Size (Prog) (kB)=2048, Internal RAM Size (kB)=256, Mounting Technology="Surface Mount", Packing="Tape and Reel"
U2 U3: library part CMP-0315-00066-2, "Enhanced Product Emc Optimized Can Transceiver, 70 mA, -55 to 125 degC, 8-pin SOIC (D), Green (RoHS & no Sb/Br)", Drivers Per Package=1, Manufacturer="Texas Instruments", Rating="HiRel Enhanced Product", Code_JEDEC=MS-012AA, ComponentLink1Description=Datasheet, ComponentLink1URL=http://www.ti.com/general/docs/lit/getliterature.tsp?genericPartNumber=SN65HVD1050-EP&fileType=pdf, DatasheetVersion=SLLS772A, Eco-Plan="Green (RoHS & no Sb/Br)", ICC(Max)(mA)="10, 70, 10", Isolated=No, Mounting Technology="Surface Mount", PackageDescription="8-Pin Plastic Small Outline Integrated Circuit, 4.9 x 3.9 mm, Pitch 1.27 mm Pitch", PackageReference=D0008A, PackageVersion="revM, Jun-2011", PartNumber=SN65HVD1050MDREP, Receivers Per Package=1, SubFamily=CAN
U7: library part CMP-0136-00497-1, "1000 mA, Low Voltage, Low Quiescent Current LDO Regulator, 3-Pin SOT-223, Extended Temperature, Tape and Reel", DatasheetVersion="revA, Aug-2007", PackageDescription="3-Lead Plastic Small Outline Transistor (DB) [SOT-223]", PackageReference=SOT-223-DB3, PackageVersion="revBB, Aug-2009"
U8 U9 U10: library part CMP-04910-000108-1, "IC CURRENT MONITOR 100DB 12DSBGA", Max Operating Temperature=125°C, Max Supply Voltage=5.5V, Min Operating Temperature=-40°C, Min Supply Voltage=2.7V, Nominal Supply Current=330uA, Package Quantity=3000, Accuracy=0.5%, Lead Free="Lead Free", Mount="Surface Mount", Number of Pins=12, Packaging="Tape and Reel", Radiation Hardening=No, RoHS Compliant=Yes
Y1: library part CMP-25159-264800-1, "MEMS OSC XO 16.0000MHZ H/LV-CMOS", Case/Package=SMD/SMT, Frequency=16MHz, Frequency Stability=20ppm, Max Operating Temperature=85°C, Max Supply Current=4.5mA, Min Operating Temperature=-40°C, Mount="Surface Mount", Packaging="Cut Tape", RoHS Compliant=Yes, Series=SIT8008B
Y2: library part CMP-25159-260514-1, "MEMS OSC XO 32.7680KHZ LVCMOS", Case/Package=SMD/SMT, Frequency=32.768kHz, Frequency Stability=100ppm, Max Operating Temperature=85°C, Max Supply Current=1.4uA, Min Operating Temperature=-40°C, Mount="Surface Mount", Packaging="Cut Tape", RoHS Compliant=Yes, Series=SiT1533

## Free pads (board coordinates)
  round 177.17 hole 129.92 mask+1.97: 3(317.85,336.85) 4(4059.15,336.85) 5(4059.15,3880.16) 6(317.85,3880.16)

## Via types
v1: diameter 24, hole 12, Top Layer to Bottom Layer, tented both sides, 893 vias
v2: diameter 22, hole 12, Top Layer to Bottom Layer, tented both sides, 166 vias

## Nets (pads, with @x,y where several pads share a name; then routed paths per layer and width w, separated by ;. In a path a pad name is that pad's centre, name@x,y a point inside that pad or via, vN(x,y) a via of type N, cw(c..) or ccw(c..) an arc to the next point about the centre after c; other vN are vias at no path point)
3V3_VCC: C1.1 C6.1 C7.1 C8.1 C9.1 C10.1 C11.1 C12.1 C13.1 C14.1 C15.1 C16.1 C17.1 C18.1 C49.1 P1.2 P2.1 P2.3 P4.4 R1.2 R18.1 R19.1 U1.6 U1.17 U1.30 U1.39 U1.52 U1.62 U1.72 U1.84 U1.95 U1.108 U1.121 U1.131 U1.144 U7.3 Y1.4 Y2.4 | length 3647
  Top Layer w8: C14.1@1671,3066.44 1674.2,3069.65 U1.108@1721.67,3069.65 ; C7.1@1821,2142.56 1824.94,2142.56 1848.56,2118.94 Y2.4@1883.28,2118.94 ; C8.1@2512.06,3070 C8.1@2516,3070
  Top Layer w10: C6.1@1538.56,2307.83 1543.19,2303.2 1580.03,2303.2 1584.66,2307.83 U1.144@1648.83,2307.83 ; C17.1@1556,2565 1557.26,2563.74 U1.131@1648.83,2563.74 ; C16.1@1556.59,2760.59 U1.121@1648.83,2760.59 ; U1.6@1820.09,2235 1820.09,2143.46 C7.1@1821,2142.56 ; U1.95@1977.57,3069.65 C13.1@1977.57,3185 ; U1.17@2036.63,2235 2036.63,2184.37 2056,2165 C1.1@2056,2134 ; R1.2@2079.63,1825 2079.63,1940 ; 2079.63,1940.37 2079.63,1940 ; Y1.4@2121,1940 2079.63,1940 ; U1.84@2194.11,3069.65 2194.11,3183.11 C12.1@2196,3185 ; C12.1@2194.11,3185 C12.1@2196,3185 ; C12.1@2198.05,3185 C12.1@2196,3185 ; C15.1@2281,2129.56 2281,2162.73 2292.54,2174.26 U1.30@2292.54,2235 ; U1.39@2483.48,2347.2 2544.05,2347.2 2558.25,2333 C9.1@2582.44,2333 ; U1.52@2483.48,2603.11 2572.89,2603.11 C10.1@2576,2600 ; U1.62@2483.48,2799.96 U1.62@2483.48,2799.96 C11.1@2573.44,2800 ; U1.72@2483.48,2996.81 2483.48,3041.42 C8.1@2512.06,3070
  Top Layer w15: C6.1@1536.57,2305.84 C6.1@1538.56,2307.83
  Top Layer w20: C18.1@1536.57,2210.99 C6.1@1536.57,2305.84 ; C1.1@2039.65,2128.65 2050.65,2128.65 C1.1@2056,2134 ; C15.1@2281,2129.56 2252.72,2129.56 2241,2117.84 2241,2035 2279,1997 2279,1880.72 2290.72,1869 2500,1869 ; C9.1@2582.44,2333 2582.44,2292.56 v1(2583,2292)
  Top Layer w25: U7.3@2157.14,1286.61 2157.28,1286.75 C49.1@2157.28,1374.86 ; C8.1@2516,3070 v1(2573,3070) ; C11.1@2573.44,2800 2574,2799.44 v2(2574,2759) ; C10.1@2576,2600 2577,2599 v2(2577,2560)
  Top Layer w40: P1.2@766,3850 884,3850 1014.76,3719.24 1169.76,3719.24 1216.5,3672.5 ; 1332,3557 1216.5,3672.5 ; P2.3@1494,3850 P2.1@1394,3850 1216.5,3672.5
  Top Layer w60: 1332,3557 1335,3554 v2(1335,3377)
  Bottom Layer w15: 1536,1865 1536.57,1865.57
  Bottom Layer w20: 2583,2279 v1(2583,2292)
  other v1: 1528,1827 1565,1829 1546,1844 1524,1855 1564,1862 1523,2070 1558,2072 1539,2089 1522,2107 1557,2107 2482,2159
  other v2: 2513,2158 2498,2175 2482,2190 2514,2191 1377,2609 1365,2630 1390,2630 1383,2835 1411,2835 1397,2855 1413,2875 1384,2876 1622,3024 1607,3042 1631,3045 1349,3398 1319,3399
5V_VCC: C21.1 C26.1 C48.2 C51.2 C52.1 C53.1 C54.1 P2.29 P2.31 P4.5 PS1.6 R3.1 R20.1 R21.1 R22.1 R24.1 R25.1 R26.1 R28.1 R29.1 R30.1 U2.3 U3.3 U7.1 U8.B1 U9.B1 U9.B3 U10.B1 | length 1471.6
  Top Layer w10: C53.1@3662.31,2563.32 3662.31,2567.25 3672.67,2577.61 3674.48,2577.61 3682,2585.13 U9.B1@3682,2622.25 ; C54.1@3669.44,3429.38 C54.1@3672.67,3432.61 ; C54.1@3672.67,3432.64 3682,3441.97 U10.B1@3682,3477.25 ; U9.B3@3682,2653.75 v1(3682,2752) ; C52.1@3698.44,985.32 3715.25,1002.13 U8.B1@3715.25,1044.25
  Top Layer w15: U2.3@1804,3443.78 1805.28,3442.5 1805.28,3366.28 C21.1@1806.56,3365 ; C26.1@2588.56,3362 C26.1@2589.78,3360.78 ; C26.1@2589,3362 U3.3@2589,3445.78 U3.3@2589,3447 ; R30.1@3459,3460.32 3459,3423.45 3464.45,3418 R28.1@3540.13,3418 ; R28.1@3540.13,3418.32 R28.1@3555,3418.32 3606.23,3418.32 C54.1@3647.57,3418.32 ; R29.1@3555,3566.32 3555.32,3566 v1(3608,3566)
  Top Layer w20: v1(1806,3320) 1806,3364.44 C21.1@1806.56,3365 ; C26.1@2589.78,3360.78 2590,3360.56 v1(2590,3322) ; R26.1@3459,2610.32 3459,2574.72 3470.4,2563.32 R24.1@3555,2563.32 C53.1@3662.31,2563.32 ; R25.1@3554.87,2718.32 R25.1@3555,2718.32 3605.32,2718.32 v1(3606,2719) ; v1@3606.23,3418.32 3606.92,3419 v1(3609,3419)
  Top Layer w30: 870,2916 871,2915 ; U7.1@2157.14,1105.51 2157.4,1105.26 C48.2@2265.7,1105.26
  Bottom Layer w10: 3605,2752 3606,2752 v1(3682,2752)
  Bottom Layer w15: v1@3607,3565 v1(3608,3566)
  Bottom Layer w30: v1@3604.49,2719.49 3606,2717.97 v1(3606,2585) ; v1(3606,2719) 3606,2752
  other v2: 3114,2837 3186,2841 3150,2855 3112,2872 3187,2875 1818,3298 1792,3299 2604,3299 2574,3300
7V4_VCC: J1.4 R23.1 U8.D3 | length 126.6
  Top Layer w10: U8.D3@3746.75,1075.75 3774.62,1103.62 R23.1@3861,1103.62
  Top Layer w16: R23.1@3861,1103.62 R23.1@3861.79,1103.62
14V8_VCC: J2.4 R27.1 U9.D3 | length 121.9
  Top Layer w10: U9.D3@3713.5,2653.75 3752.75,2653.75 3780.31,2681.31 R27.1@3824,2681.31
25V9_VCC: J3.4 R31.1 U10.D3 | length 119.5
  Top Layer w10: U10.D3@3713.5,3508.75 3740.75,3508.75 3767.31,3535.31 R31.1@3822,3535.31
AGND: C5.2 R17.2 U1.31 | length 274.8
  Top Layer w10: U1.31@2312.22,2235 2312.22,2080.74 2318.08,2074.88 C5.2@2351,2074.88
  Top Layer w25: R17.2@2351,1995.52 C5.2@2351,2074.88
ALE_PM1: R21.2 U1.66 U8.A3 | length 2538.7
  Top Layer w10: U1.66@2483.48,2878.7 2836.4,2878.7 2879.63,2835.47 2925.53,2835.47 v1(3584,2177) ; R21.2@3591,1168.68 v1(3591,1209) ; R21.2@3601.06,1159.68 3601.99,1158.76 3601.99,1157.01 3683.25,1075.75 U8.A3@3699.5,1075.75
  Bottom Layer w10: v1(3584,2177) 3581.47,2174.47 3581.47,1623.63 3591,1614.1 v1(3591,1209)
ALE_PM2: R25.2 U1.67 U9.A3 | length 1369.8
  Top Layer w10: U1.67@2483.48,2898.39 2851.39,2898.39 2867.53,2914.53 3456.47,2914.53 3555,2816 R25.2@3555,2767.68 ; R25.2@3554.87,2767.68 3627.32,2767.68 3666.25,2728.75 U9.A3@3666.25,2653.75
ALE_PM3: R29.2 U1.68 U10.A3 | length 1813.5
  Top Layer w10: U1.68@2483.48,2918.07 2846.74,2918.07 2858.19,2929.53 3241.53,2929.53 3303,2991 v1(3365,2991) ; v1(3365,3073) 3365,3464.74 3467.52,3567.26 3514.87,3614.61 3538.92,3614.61 3540,3615.68 R29.2@3555,3615.68 3593.43,3615.68 3666,3543.11 3666,3509 U10.A3@3666.25,3508.75
  Bottom Layer w10: v1(3365,2991) v1(3365,3073)
AVDD: C5.1 U1.32 U1.33 | length 184
  Top Layer w10: U1.32@2331.91,2235 2331.91,2173.86 2337.76,2168 2350.98,2168 2351,2198.49 2351.59,2199.08 U1.33@2351.59,2235 ; C5.1@2351,2137.56 C5.1@2353.56,2135
  Top Layer w20: C5.1@2351,2137.56 2351,2168.02
BOOT0_STM: R5.1 U1.138 | length 119.1
  Top Layer w10: R5.1@1536.37,2437 1538.87,2439.5 1583.5,2439.5 1597.06,2425.94 U1.138@1648.83,2425.94
CAN_EGSE_N: P2.21 R12.2 U3.6 | length 424.1
  Top Layer w10: P2.21@2394,3850 2385.17,3841.17 2359.86,3841.17 2354,3835.31 2354,3827.03 2378.33,3802.7 2556.43,3802.7 2574,3785.13 2574,3762.67 2584.18,3752.49 R12.2@2584.18,3752 2584.18,3751.51 2574,3741.33 2574,3701.56 2579.86,3695.7 2581.2,3695.7 2589,3687.91 U3.6@2589,3668.22
CAN_EGSE_P: P2.19 R12.1 U3.7 | length 424.1
  Top Layer w10: P2.19@2294,3850 2302.83,3841.17 2328.14,3841.17 2334,3835.31 2334,3818.74 2370.04,3782.7 2548.14,3782.7 2554,3776.84 2554,3762.67 2543.82,3752.49 R12.1@2543.82,3752 2543.82,3751.51 2554,3741.33 2554,3701.56 2548.14,3695.7 2546.8,3695.7 2539,3687.91 U3.7@2539,3668.22
CAN_EGSE_RX: U1.73 U3.4 | length 555.7
  Top Layer w10: U1.73@2410.65,3069.65 2410.65,3174.65 2441,3205 2586,3205 2639,3258 U3.4@2639,3445.78
CAN_EGSE_TX: U1.74 U3.1 | length 416.7
  Top Layer w10: U1.74@2390.96,3069.65 2390.96,3184.96 2489,3283 U3.1@2489,3445.78
CAN_Motor_N: P2.13 R9.2 U2.6 | length 360.2
  Top Layer w10: U2.6@1804,3666.22 1804,3685.91 1796.2,3693.7 1794.86,3693.7 1789,3699.56 1789,3739.33 1799.18,3749.51 R9.2@1799.18,3750 1799.18,3750.49 1789,3760.67 1789,3774.84 1804.63,3790.47 1872.37,3790.47 1892.37,3810.47 1916.51,3810.47 1949.47,3843.44 1987.44,3843.44 P2.13@1994,3850
CAN_Motor_P: P2.11 R9.1 U2.7 | length 290.7
  Top Layer w10: U2.7@1754,3666.22 1754,3685.91 1761.8,3693.7 1763.14,3693.7 1769,3699.56 1769,3739.33 1758.82,3749.51 R9.1@1758.82,3750 1758.82,3750.49 1769,3760.67 1769,3783.13 1796.35,3810.47 1864.09,3810.47 1894,3840.38 P2.11@1894,3850
CAN_Motor_RX: U1.103 U2.4 | length 388.2
  Top Layer w10: U1.103@1820.09,3069.65 1820.09,3205.48 1853,3238.39 1853,3442.78 U2.4@1854,3443.78
CAN_Motor_TX: U1.104 U2.1 | length 414.1
  Top Layer w10: U2.1@1704,3443.78 1704,3340.89 1800.41,3244.48 U1.104@1800.41,3069.65
Chassis_GND: pad.3 pad.4 pad.5 pad.6 R16.1 | length 11360.2
  Top Layer w30: pad.4@4059.15,336.85 3927.3,205 449.7,205 pad.3@317.85,336.85 317.85,344.97 191,471.82 191,2470 191,3745.19 317.85,3872.04 pad.6@317.85,3880.16 462.69,4025 3914.31,4025 pad.5@4059.15,3880.16
CTS_IMU: P5.4 U1.35 | length 613.7
  Top Layer w10: U1.35@2390.96,2235 U1.35@2390.96,2235 2391,2181 v1(2428,2144)
  Bottom Layer w10: v1(2428,2144) 2428.86,2144 2440.86,2132 2813,2132 P5.4@2896,2215
DIO0_sx_U_LoRa_downlink: 
DIO0_sx_U_LoRa_uplink: 
DIO0_U_LoRa_downlink: LoRa_downlink.12 U1.140 | length 1252.6
  Top Layer w10: LoRa_downlink.12@971,1640 LoRa_downlink.12@971.43,1640.43 ; v1(1268.56,1867.44) 1266,1870 1266,2205.81 1447.24,2387.06 1648.35,2387.06 U1.140@1648.83,2386.57
  Bottom Layer w10: LoRa_downlink.12@971,1640 973.67,1642.67 1009.67,1642.67 1052.47,1685.47 1193.59,1685.47 1231.47,1723.36 1231.47,1756.37 1266,1790.9 1266,1864.89 v1(1268.56,1867.44)
DIO0_U_LoRa_uplink: LoRa_uplink.12 U1.46 | length 1606.8
  Top Layer w10: U1.46@2483.48,2485 2539,2485 2541,2487 2768.11,2487 2781,2474.11 2781,2473.89 2880.89,2374 3158.21,2374 3381,2151.21 3381,1924.1 3474,1831.1 3474,1687 LoRa_uplink.12@3521,1640
DIO1_sx_U_LoRa_downlink: 
DIO1_sx_U_LoRa_uplink: 
DIO1_U_LoRa_downlink: LoRa_downlink.5
DIO1_U_LoRa_uplink: LoRa_uplink.5
DIO2_sx_U_LoRa_downlink: 
DIO2_sx_U_LoRa_uplink: 
DIO2_U_LoRa_downlink: LoRa_downlink.17
DIO2_U_LoRa_uplink: LoRa_uplink.17
DIO3_sx_U_LoRa_downlink: 
DIO3_sx_U_LoRa_uplink: 
DIO3_U_LoRa_downlink: LoRa_downlink.6
DIO3_U_LoRa_uplink: LoRa_uplink.6
DIO4_sx_U_LoRa_downlink: 
DIO4_sx_U_LoRa_uplink: 
DIO4_U_LoRa_downlink: LoRa_downlink.11
DIO4_U_LoRa_uplink: LoRa_uplink.11
DIO5_sx_U_LoRa_downlink: 
DIO5_sx_U_LoRa_uplink: 
DIO5_U_LoRa_downlink: LoRa_downlink.9
DIO5_U_LoRa_uplink: LoRa_uplink.9
FC_GND: C25.2 J1.1 J1.2 PS1.1
FC_VCC: C25.1 J1.3 L1.1 R23.2 U8.D1 U8.D2 | length 172.9
  Top Layer w10: U8.D1@3746.75,1044.25 3780.25,1044.25 3807.5,1017.01 R23.2@3861,1017.01 ; U8.D2@3746.75,1060 3775.14,1060 3781,1054.14 3781,1043.5
FEM_ANT_SEL_U_LoRa_downlink: LoRa_downlink.16
FEM_ANT_SEL_U_LoRa_uplink: LoRa_uplink.16
FEM_CPS_U_LoRa_downlink: LoRa_downlink.18 U1.141 | length 1001.5
  Top Layer w10: v1(1321,1870) 1321,2232 1455.96,2366.96 1648.76,2366.96 U1.141@1648.83,2366.89
  Bottom Layer w10: LoRa_downlink.18@1271,1640 1321,1690 v1(1321,1870) v1@1321,1875
FEM_CPS_U_LoRa_uplink: LoRa_uplink.18
FEM_CSD_U_LoRa_downlink: LoRa_downlink.19
FEM_CSD_U_LoRa_uplink: LoRa_uplink.19
FEM_CTX_U_LoRa_downlink: LoRa_downlink.20
FEM_CTX_U_LoRa_uplink: LoRa_uplink.20 U1.45 | length 1870.7
  Top Layer w10: U1.45@2483.48,2465.32 2758.69,2465.32 v1(2759,2465) ; v1(2821,2465) 3251.9,2465 3660.53,2056.37 3868.93,1847.97 3868.93,1692.07 LoRa_uplink.20@3921,1640
  Bottom Layer w10: v1(2759,2465) v1(2821,2465)
FEM_SPARE_U_LoRa_downlink: LoRa_downlink.14
FEM_SPARE_U_LoRa_uplink: LoRa_uplink.14